# EAGLE board LnControlPanel (EAGLE 9.6.2)
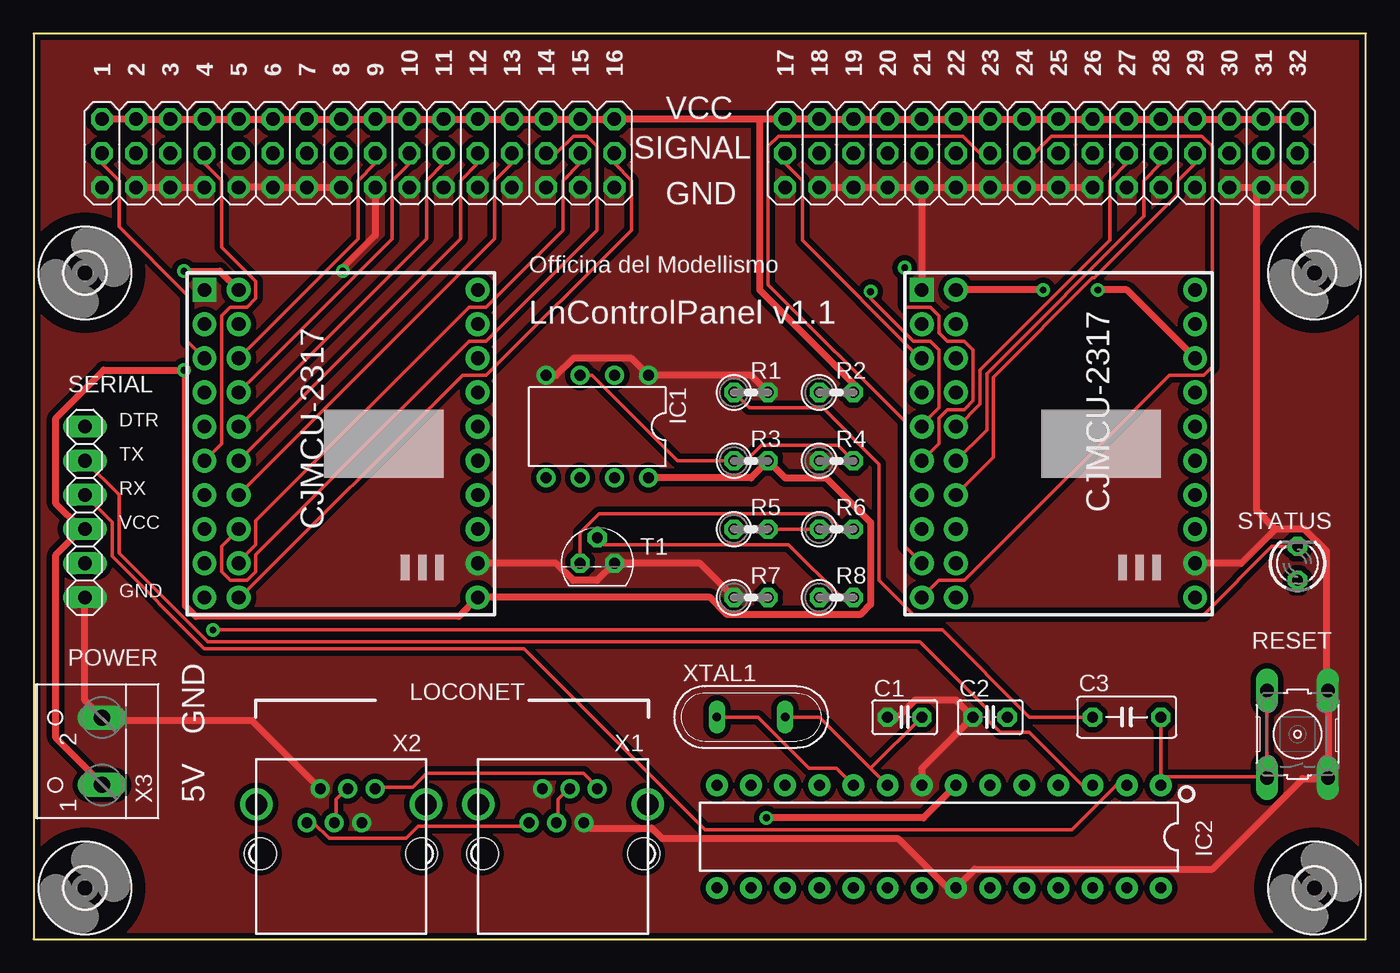
[diagram p0: board, top side]
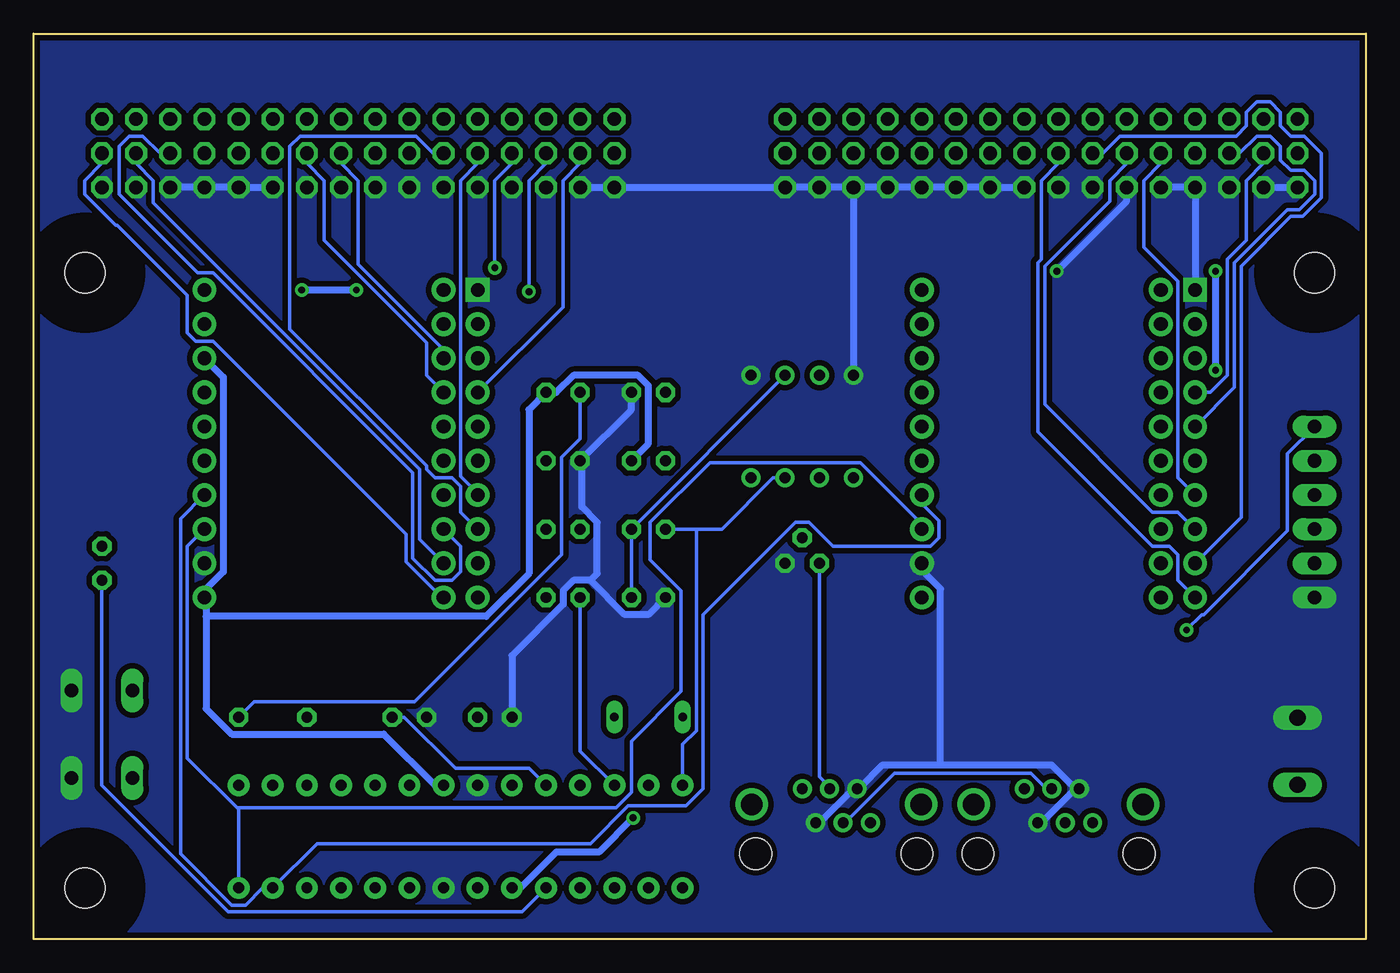
[diagram p1: board, bottom side, seen from below]

Size 99.06 x 67.31 mm. Coordinates in mm from the lower left corner, seen from the top.
Outline: 0,0 99.06,0 99.06,67.31 0,67.31 0,0
Copper layers (1*16): Top 0.035mm / dielectric 1.5mm / Bottom 0.035mm
Design rules "SparkFun": minimum track width 8mil, minimum drill 20mil, track to track 8mil, track to pad 8mil, pad to pad 8mil, via to via 8mil, smd to smd 8mil, copper to edge 10mil, drill to drill 8mil, minimum pad ring 12mil, minimum via ring 10mil, stop-mask expansion 4mil, vias tented up to drill 25mil, thermal gap 10mil
Net classes: 0 default: width 0.254 mm, clearance 0.254 mm; 1 power: width 0.508 mm, clearance 0.254 mm

## Footprints (pad centres in the part's own frame; a part is rotated, then mirrored left to right if it is on the bottom)
C025-025X050 = drill 0.813 octagon: 1 -1.27,0; 2 1.27,0
C050-030X075 = drill 0.813 octagon: 1 -2.54,0; 2 2.54,0
3,0 = hole 3: 0,0
DIL08 = drill 0.813 pad 1.27: 1 -3.81,-3.81; 2 -1.27,-3.81; 3 1.27,-3.81; 4 3.81,-3.81; 5 3.81,3.81; 6 1.27,3.81; 7 -1.27,3.81; 8 -3.81,3.81
3X16 = drill 1.016 octagon: 1 -19.05,-1.27; 2 -19.05,1.27; 3 -16.51,-1.27; 4 -16.51,1.27; 5 -13.97,-1.27; 6 -13.97,1.27; 7 -11.43,-1.27; 8 -11.43,1.27; 9 -8.89,-1.27; 10 -8.89,1.27; 11 -6.35,-1.27; 12 -6.35,1.27; 13 -3.81,-1.27; 14 -3.81,1.27; 15 -1.27,-1.27; 16 -1.27,1.27; 17 1.27,-1.27; 18 1.27,1.27; 19 3.81,-1.27; 20 3.81,1.27; 21 6.35,-1.27; 22 6.35,1.27; 23 8.89,-1.27; 24 8.89,1.27; 25 11.43,-1.27; 26 11.43,1.27; 27 13.97,-1.27; 28 13.97,1.27; 29 16.51,-1.27; 30 16.51,1.27; 31 19.05,-1.27; 32 19.05,1.27; 33 -19.05,-3.81; 34 -16.51,-3.81; 35 -13.97,-3.81; 36 -11.43,-3.81; 37 -8.89,-3.81; 38 -6.35,-3.81; 39 -3.81,-3.81; 40 -1.27,-3.81; 41 1.27,-3.81; 42 3.81,-3.81; 43 6.35,-3.81; 44 8.89,-3.81; 45 11.43,-3.81; 46 13.97,-3.81; 47 16.51,-3.81; 48 19.05,-3.81
LED3MM = drill 0.813 octagon: A -1.27,0; K 1.27,0
CJMCU-2317-PACKAGE2 = drill 1.016 pad 1.778: A0 7.62,5.08; A1 7.62,7.62; A2 7.62,10.16; CS 7.62,-2.54; GND 7.62,-10.16; ITA -12.7,7.62; ITB -10.16,7.62; PA0 -12.7,5.08; PA1 -12.7,2.54; PA2 -12.7,0; PA3 -12.7,-2.54; PA4 -12.7,-5.08; PA5 -12.7,-7.62; PA6 -12.7,-10.16; PA7 -12.7,-12.7; PB0 -10.16,5.08; PB1 -10.16,2.54; PB2 -10.16,0; PB3 -10.16,-2.54; PB4 -10.16,-5.08; PB5 -10.16,-7.62; PB6 -10.16,-10.16; PB7 -10.16,-12.7; RST 7.62,2.54; SCL 7.62,-7.62; SDA 7.62,-5.08; SO 7.62,0; VCC 7.62,-12.7; VCC_2 -10.16,10.16 | drill 1.016 pad 1.778 square: GND_2 -12.7,10.16
0207/2V = drill 0.813 octagon: 1 -1.27,0; 2 1.27,0
B3F-10XX = drill 1.016 long: 1 -3.251,2.261; 2 3.251,2.261; 3 -3.251,-2.261; 4 3.251,-2.261
1X06 = drill 1.016 long: 1 -6.35,0; 2 -3.81,0; 3 -1.27,0; 4 1.27,0; 5 3.81,0; 6 6.35,0
TO92 = drill 0.813 octagon: 1 1.27,0; 2 0,1.905; 3 -1.27,0
DIP28 = drill 0.813 pad 1.626: 1 -16.51,-3.81; 2 -13.97,-3.81; 3 -11.43,-3.81; 4 -8.89,-3.81; 5 -6.35,-3.81; 6 -3.81,-3.81; 7 -1.27,-3.81; 8 1.27,-3.81; 9 3.81,-3.81; 10 6.35,-3.81; 11 8.89,-3.81; 12 11.43,-3.81; 13 13.97,-3.81; 14 16.51,-3.81; 15 16.51,3.81; 16 13.97,3.81; 17 11.43,3.81; 18 8.89,3.81; 19 6.35,3.81; 20 3.81,3.81; 21 1.27,3.81; 22 -1.27,3.81; 23 -3.81,3.81; 24 -6.35,3.81; 25 -8.89,3.81; 26 -11.43,3.81; 27 -13.97,3.81; 28 -16.51,3.81
YH-55-10 = drill 0.8 pad 1.3: 1 -2.54,2.3; 2 -1.54,4.84; 3 -0.5,2.3; 4 0.5,4.84; 5 1.54,2.3; 6 2.54,4.84 | drill 1.6 pad 2.184: S1 -6.3,3.68; S2 6.3,3.68 | hole 2.36: -6,0; 6,0
W237-102 = drill 1.194 long: 1 -2.5,-1.27; 2 2.5,-1.27
QS = drill 0.61 long: 1 -2.54,0; 2 2.54,0

## Placement (x,y rotation side)
C1  22pF  [C025-025X050]  64.77,16.51 0 top
C2  22pF  [C025-025X050]  71.12,16.51 0 top
C3  100nF  [C050-030X075]  81.28,16.51 180 top
H1  MOUNT-HOLE3.0  [3,0]  3.81,49.53 0 top
H2  MOUNT-HOLE3.0  [3,0]  95.25,49.53 0 top
H3  MOUNT-HOLE3.0  [3,0]  3.81,3.81 0 top
H4  MOUNT-HOLE3.0  [3,0]  95.25,3.81 0 top
IC1  LM311N  [DIL08]  41.91,38.1 180 top
JP1  [3X16]  24.13,59.69 0 top
JP2  [3X16]  74.93,59.69 0 top
LED1  [LED3MM]  93.98,27.94 90 top
M1  CJMCU-2317LARGE  [CJMCU-2317-PACKAGE2]  25.4,38.1 0 top
M2  CJMCU-2317LARGE  [CJMCU-2317-PACKAGE2]  78.74,38.1 0 top
R1  1k  [0207/2V]  53.34,40.64 0 top
R2  10k  [0207/2V]  59.69,40.64 0 top
R3  10k  [0207/2V]  53.34,35.56 0 top
R4  22k  [0207/2V]  59.69,35.56 0 top
R5  220k  [0207/2V]  53.34,30.48 0 top
R6  47k  [0207/2V]  59.69,30.48 0 top
R7  150k  [0207/2V]  53.34,25.4 0 top
R8  4.7k  [0207/2V]  59.69,25.4 0 top
RESET_SW  [B3F-10XX]  93.98,15.24 90 top
SERIAL  [1X06]  3.81,31.75 90 top
T1  BC337  [TO92]  41.91,27.94 0 top
U1  328P  [DIP28]  67.31,7.62 180 top
X1  YH-55-10  [YH-55-10]  39.37,6.35 0 top
X2  YH-55-10  [YH-55-10]  22.86,6.35 0 top
X3  [W237-102]  3.81,13.97 90 top
XTAL1  16MHz  [QS]  53.34,16.51 0 top

## Library data of the parts
C1-C3 = rcl; SPICEPREFIX: C
H1-H4 = holes
IC1 = linear
JP1 JP2 M1 M2 = LucaDentella
LED1 = led
R1 R2 = rcl; SPICEPREFIX: R
R3-R8 = rcl
RESET_SW = switch-omron; MPN: B3F-1000; OC_FARNELL: 176432; OC_NEWARK: 36M3542
SERIAL = pinhead
T1 = transistor
U1 = SparkFun-IC-Microcontroller; PROD_ID: IC-09136
X1 X2 = con-wenzhou-yihua; OC_FARNELL: unknown; OC_NEWARK: unknown
X3 = con-wago-500; MPN: 237-102; OC_FARNELL: unknown; OC_NEWARK: 70K9898
XTAL1 = special

## Nets
+5V [power]: IC1.8 JP1.2 JP1.4 JP1.6 JP1.8 JP1.10 JP1.12 JP1.14 JP1.16 JP1.18 JP1.20 JP1.22 JP1.24 JP1.26 JP1.28 JP1.30 JP1.32 JP2.2 JP2.4 JP2.6 JP2.8 JP2.10 JP2.12 JP2.14 JP2.16 JP2.18 JP2.20 JP2.22 JP2.24 JP2.26 JP2.28 JP2.30 JP2.32 M1.VCC M1.VCC_2 M2.A0 M2.VCC M2.VCC_2 R2.2 R3.2 SERIAL.3 U1.7 U1.20 X3.1
GND [power]: C1.1 C2.1 IC1.1 IC1.4 JP1.33 JP1.34 JP1.35 JP1.36 JP1.37 JP1.38 JP1.39 JP1.40 JP1.41 JP1.42 JP1.43 JP1.44 JP1.45 JP1.46 JP1.47 JP1.48 JP2.33 JP2.34 JP2.35 JP2.36 JP2.37 JP2.38 JP2.39 JP2.40 JP2.41 JP2.42 JP2.43 JP2.44 JP2.45 JP2.46 JP2.47 JP2.48 M1.GND M1.GND_2 M2.GND M2.GND_2 R1.2 R4.1 R7.1 RESET_SW.3 RESET_SW.4 SERIAL.1 T1.1 U1.8 U1.22 X1.2 X1.5 X2.2 X2.5 X3.2
LNET: R6.2 T1.3 X1.3 X1.4 X2.3 X2.4
LNET_RX: IC1.7 R5.1 U1.14
LNET_TX: R8.1 U1.12
N$1: R8.2 T1.2
N$2: C2.2 U1.10 XTAL1.1
N$3: IC1.3 R3.1 R4.2
N$4: C1.2 U1.9 XTAL1.2
N$5: IC1.2 R5.2 R6.1 R7.2
N$6: JP1.1 M1.PA0
N$7: JP1.3 M1.PA1
N$8: JP1.5 M1.PA2
N$9: JP1.7 M1.PA3
N$10: JP1.9 M1.PA4
N$11: JP1.11 M1.PA5
N$12: JP1.13 M1.PA6
N$13: JP1.15 M1.PA7
N$14: JP1.17 M1.PB0
N$15: JP1.19 M1.PB1
N$16: JP1.21 M1.PB2
N$17: JP1.23 M1.PB3
N$18: JP1.25 M1.PB4
N$19: JP1.27 M1.PB5
N$20: JP1.29 M1.PB6
N$21: JP1.31 M1.PB7
N$22: JP2.1 M2.PA0
N$23: JP2.3 M2.PA1
N$24: JP2.5 M2.PA2
N$25: JP2.7 M2.PA3
N$26: JP2.9 M2.PA4
N$27: JP2.11 M2.PA5
N$28: JP2.13 M2.PA6
N$29: JP2.15 M2.PA7
N$30: JP2.17 M2.PB0
N$31: JP2.19 M2.PB1
N$32: JP2.21 M2.PB2
N$33: JP2.23 M2.PB3
N$34: JP2.25 M2.PB4
N$35: JP2.27 M2.PB5
N$36: JP2.29 M2.PB6
N$37: JP2.31 M2.PB7
N$38: C3.2 SERIAL.6
N$39: LED1.A U1.19
N$40: LED1.K R1.1
N$41: X1.1 X2.1
N$42: X1.6 X2.6
RESET: C3.1 R2.1 RESET_SW.1 RESET_SW.2 U1.1
RX: SERIAL.4 U1.2
SCL: M1.SCL M2.SCL U1.28
SDA: M1.SDA M2.SDA U1.27
TX: SERIAL.5 U1.3

## Tracks (layer width: path | path; a pad name or v marks a point on that pad's centre or on a via)
+5V  (via drill 0.51)
  Top 0.508: v54.48,9.02 66.17,9.02 U1.7 | v75.06,48.26 M2.VCC_2 | v79.12,48.26 81.28,48.26 M2.A0 | X3.1 5.08,11.56 1.65,14.99 1.65,28.58 3.56,30.48 SERIAL.3 3.43,30.61 1.65,32.39 1.65,38.73 5.21,42.29 v11.18,42.29 11.3,42.16 11.3,24.77 12.06,24 31.62,24 M1.VCC 50.29,25.4 51.56,24.13 61.47,24.13 62.23,24.89 62.23,30.99 58.93,34.29 55.88,34.29 R3.2 53.34,34.29 IC1.8 | M1.VCC_2 13.84,49.66 v11.18,49.66 | JP1.2 JP1.4 JP1.6 JP1.8 JP1.10 JP1.12 JP1.14 JP1.16 JP1.18 JP1.20 JP1.22 JP1.24 JP1.26 JP1.28 JP1.30 JP1.32 53.98,60.96 | JP2.32 JP2.30 JP2.28 JP2.26 JP2.24 JP2.22 JP2.20 JP2.18 JP2.16 JP2.14 JP2.12 JP2.10 JP2.8 JP2.6 JP2.4 JP2.2 53.98,60.96 | R2.2 60.96,41.28 53.98,48.26 53.98,60.96
  Bottom 0.508: U1.20 62.87,3.81 60.2,6.48 57.02,6.48 v54.48,9.02 | M2.A0 84.96,41.78 84.96,27.3 86.36,25.91 M2.VCC 86.23,25.27 86.23,24 | v79.12,48.26 v75.06,48.26 | U1.7 69.22,11.43 73.03,15.24 84.33,15.24 86.23,17.15 86.23,24 | v11.18,42.29 v11.18,49.66 | R3.2 53.34,36.83 53.34,41.15 54.1,41.91 58.93,41.91 60.2,40.64 R2.2 62.23,39.37 62.23,27.18 65.41,24 86.23,24
GND  (via drill 0.51)
  Top 0.508: IC1.4 38.86,41.91 40.13,43.18 44.45,43.18 IC1.1 53.34,41.91 R1.2 | C1.1 64.26,16.51 65.53,17.78 68.58,17.78 C2.1 66.04,12.7 U1.8 | R7.1 49.53,27.94 T1.1 41.91,26.67 40.13,26.67 38.86,27.94 M1.GND | JP1.37 JP1.38 JP1.39 JP1.40 | JP1.34 JP1.35 JP1.36 | JP2.34 JP2.35 JP2.36 JP2.37 | JP2.37 JP2.38 JP2.39 JP2.40 JP2.41 JP2.42 | JP2.37 M2.GND_2 | v22.99,49.66 22.99,49.91 25.4,52.32 JP1.41 | JP2.46 JP2.47 | JP2.47 JP2.48 | M2.GND 89.79,27.94 92.33,30.48 | 92.33,30.48 94.49,30.48 96.14,28.83 96.14,18.67 RESET_SW.4 96.27,18.41 96.27,12.06 RESET_SW.3 96.01,11.94 94.36,11.94 87.63,5.21 69.98,5.21 U1.22 67.94,3.81 64.26,7.49 46.74,7.49 45.97,8.26 41.4,8.26 41.02,8.64 X1.5 | 92.33,30.48 90.93,31.88 90.93,55.75 JP2.47 | SERIAL.1 3.81,17.78 5.08,16.51 X3.2 5.21,16.26 16.26,16.26 21.21,11.3 X2.2
  Bottom 0.508: R1.2 54.61,39.37 R4.1 58.29,35.43 58.29,32.13 57.15,30.99 57.15,27.18 57.66,26.67 | C1.1 63.5,21.08 59.69,24.89 59.69,25.91 58.93,26.67 57.66,26.67 | 57.66,26.67 55.12,24.13 53.34,24.13 R7.1 | JP1.34 JP1.33 | M1.GND_2 JP1.36 JP1.37 | JP1.41 JP1.42 JP1.43 JP1.44 JP1.45 JP1.46 | JP1.46 JP1.47 JP1.48 JP2.33 JP2.34 | JP1.38 17.78,54.86 v22.99,49.66 | JP1.46 IC1.4 | JP2.43 JP2.44 JP2.45 JP2.46 | X2.5 24.38,8.76 24,8.76 21.59,11.18 21.34,11.18 X2.2 21.72,11.3 23.37,12.95 31.62,12.95 | X1.5 40.89,8.76 40.51,8.76 38.1,11.18 37.85,11.18 X1.2 37.59,11.3 35.94,12.95 31.62,12.95 | M1.GND 33.02,27.43 31.62,26.03 31.62,12.95
  pour Top (isolate 0.406, no thermals): 0,67.31 99.06,67.31 99.06,0 0,0
  pour Bottom (isolate 0.406, no thermals): 0,67.31 99.06,67.31 99.06,1.27 99.06,0 0,0
LNET
  Top 0.254: X2.3 22.48,8.76 22.48,10.41 23.24,11.18 X2.4 | X1.3 38.99,8.76 38.99,10.41 39.75,11.18 X1.4 | R6.2 60.07,30.48 58.93,31.62 42.04,31.62 40.64,30.23 T1.3
  Bottom 0.254: T1.3 40.64,12.06 39.88,11.3 X1.4 | X2.4 23.37,11.3 23.88,11.3 24.89,12.32 35.05,12.32 38.61,8.76 38.86,8.76 X1.3
LNET_RX
  Bottom 0.254: IC1.7 44.07,34.29 47.88,30.48 49.78,30.48 | R5.1 49.78,30.48 | U1.14 50.8,14.48 49.78,15.49 49.78,30.48
LNET_TX
  Bottom 0.254: R8.1 58.42,13.97 U1.12
N$1
  Top 0.254: R8.2 60.07,25.4 56.13,29.34 42.42,29.34 T1.2
N$2
  Top 0.254: XTAL1.1 53.85,16.51 57.66,12.7 59.69,12.7 U1.10
  Bottom 0.254: C2.2 71.5,16.51 67.69,12.7 62.23,12.7 U1.10
N$3
  Top 0.254: R4.2 59.82,36.7 54.1,36.7 52.96,35.56 R3.1 47.88,35.56 41.53,41.91 IC1.3
N$4
  Top 0.254: XTAL1.2 58.42,16.51 62.23,12.7 | U1.9 62.23,12.7 | 62.23,12.7 C1.2
N$5
  Top 0.254: R5.2 R6.1
  Bottom 0.254: R7.2 R5.2 IC1.2
N$6
  Top 0.254: JP1.1 5.08,57.66 6.35,56.39 6.35,52.96 11.43,47.88 11.43,44.45 M1.PA0
N$7
  Bottom 0.254: JP1.3 7.62,57.66 8.89,56.39 8.89,51.94 10.29,50.55 10.29,41.91 11.56,40.64 M1.PA1
N$8
  Bottom 0.254: JP1.5 9.4,58.42 8.13,59.69 7.11,59.69 6.35,58.93 6.35,57.91 5.59,57.15 4.57,57.15 3.81,56.39 3.81,55.37 4.95,54.23 5.84,54.23 9.78,50.29 9.78,41.02 M1.PA2
N$9
  Top 0.254: JP1.7 12.7,57.66 13.97,56.39 13.97,51.44 16.51,48.89 16.51,47.62 15.88,46.99 14.61,46.99 13.97,46.36 13.97,36.83 M1.PA3
N$10
  Bottom 0.254: JP1.9 15.24,57.66 16.51,56.39 16.51,51.44 13.97,48.89 13.97,34.29 M1.PA4
N$11
  Bottom 0.254: JP1.11 17.78,57.66 19.05,56.39 19.05,54.86 23.88,50.04 23.88,39.75 15.88,31.75 13.97,31.75 M1.PA5
N$12
  Bottom 0.254: JP1.13 19.56,58.42 18.29,59.69 9.65,59.69 8.89,60.45 8.89,61.47 8.13,62.23 7.11,62.23 6.35,61.47 6.35,60.45 5.59,59.69 4.57,59.69 3.3,58.42 3.3,55.12 4.7,53.72 5.59,53.72 9.27,50.04 9.27,31.37 M1.PA6
N$13
  Bottom 0.254: JP1.15 22.86,57.66 24.13,56.39 24.13,50.55 24.38,50.29 24.38,37.72 15.88,29.21 14.61,29.21 13.97,28.58 13.97,26.67 M1.PA7
N$14
  Top 0.254: JP1.17 25.4,57.66 24.13,56.39 24.13,52.07 M1.PB0
N$15
  Top 0.254: JP1.19 27.94,57.66 26.67,56.39 26.67,52.07 M1.PB1
N$16
  Top 0.254: JP1.21 30.48,57.66 29.21,56.39 29.21,52.07 M1.PB2
N$17
  Top 0.254: JP1.23 33.02,57.66 31.75,56.39 31.75,52.07 M1.PB3
N$18
  Top 0.254: JP1.25 35.56,57.66 34.29,56.39 34.29,52.07 M1.PB4
N$19
  Top 0.254: JP1.27 38.86,58.42 40.13,59.69 41.15,59.69 41.91,58.93 41.91,52.7 33.66,44.45 32.38,44.45 16.51,28.58 16.51,27.3 15.88,26.67 14.61,26.67 13.97,27.3 13.97,29.21 M1.PB5
N$20
  Top 0.254: JP1.29 40.64,57.66 39.37,56.39 39.37,52.7 33.66,46.99 32.38,46.99 16.51,31.12 16.51,29.34 15.24,28.07 M1.PB6
N$21
  Top 0.254: JP1.31 43.18,57.66 44.45,56.39 44.45,52.7 33.66,41.91 31.88,41.91 15.37,25.4 M1.PB7
N$22
  Top 0.254: JP2.1 55.88,57.66 57.15,56.39 57.15,51.94 65.91,43.18 M2.PA0
N$23
  Bottom 0.254: JP2.3 58.42,57.66 59.69,56.39 59.69,46.99 M2.PA1
N$24  (via drill 0.51)
  Top 0.254: v62.23,48.13 62.23,47.62 65.41,44.45 66.67,44.45 67.31,43.81 67.31,39.5 66.04,38.23 M2.PA2
  Bottom 0.254: JP2.5 60.96,57.66 62.23,56.39 v62.23,48.13
N$25  (via drill 0.51)
  Top 0.254: v64.77,49.91 64.77,47.12 64.9,46.99 66.67,46.99 67.31,46.36 67.31,45.08 67.94,44.45 69.22,44.45 69.85,43.81 69.85,40 69.22,39.37 67.94,39.37 67.31,38.73 67.31,36.83 M2.PA3
  Bottom 0.254: JP2.7 63.5,57.66 64.77,56.39 v64.77,49.91
N$26
  Bottom 0.254: JP2.9 66.04,57.66 67.31,56.39 67.31,34.42 66.04,33.15 M2.PA4
N$27
  Bottom 0.254: JP2.11 69.34,58.42 70.61,59.69 79.25,59.69 80.01,58.93 80.01,45.34 69.85,35.18 69.85,34.92 69.22,34.29 67.94,34.29 67.31,33.66 67.31,31.75 M2.PA5
N$28
  Top 0.254: JP2.13 70.36,58.42 69.09,59.69 55.37,59.69 54.61,58.93 54.61,48.64 64.77,38.48 64.77,29.21 M2.PA6
N$29
  Top 0.254: JP2.15 74.42,58.42 75.69,59.69 86.87,59.69 87.63,58.93 87.63,42.55 87,41.91 84.45,41.91 69.22,26.67 67.31,26.67 M2.PA7
N$30
  Bottom 0.254: JP2.17 76.2,57.66 74.93,56.39 74.93,50.17 68.58,43.81 M2.PB0
N$31
  Bottom 0.254: JP2.19 78.74,57.66 77.47,56.39 77.47,51.94 69.85,44.32 69.85,41.91 M2.PB1
N$32
  Top 0.254: JP2.21 81.28,57.66 80.01,56.39 80.01,51.94 70.36,42.29 70.36,39.75 68.71,38.1 M2.PB2
N$33
  Top 0.254: JP2.23 83.82,57.66 82.55,56.39 82.55,53.72 70.87,42.04 70.87,37.85 M2.PB3
N$34
  Top 0.254: JP2.25 86.36,57.66 85.09,56.39 85.09,55.37 78.87,49.15 78.74,49.15 71.37,41.78 71.37,35.81 M2.PB4
N$35
  Bottom 0.254: JP2.27 89.66,58.42 90.93,59.69 91.95,59.69 92.71,58.93 92.71,55.37 86.87,49.53 85.72,49.53 70.87,34.67 70.87,28.32 69.22,26.67 67.94,26.67 67.31,27.3 67.31,29.21 M2.PB5
N$36
  Bottom 0.254: JP2.29 91.44,57.66 90.17,56.39 90.17,54.74 70.36,34.92 70.36,29.72 M2.PB6
N$37
  Bottom 0.254: JP2.31 93.98,57.66 95.25,56.39 95.25,55.37 92.96,53.09 92.84,53.09 87.63,47.88 87.63,45.08 87,44.45 85.72,44.45 71.37,30.1 71.37,28.07 68.71,25.4 M2.PB7
N$38  (via drill 0.51)
  Top 0.254: C3.2 74.04,16.51 67.56,22.99 v13.34,22.99
  Bottom 0.254: v13.34,22.99 12.19,24.13 12.06,24.13 5.84,30.35 5.84,36.07 SERIAL.6
N$39
  Bottom 0.254: LED1.A 93.98,11.43 84.58,2.03 62.74,2.03 U1.19
N$40
  Top 0.254: LED1.K 92.08,29.21 87,24.13 65.41,24.13 62.87,26.67 62.87,35.31 58.67,39.5 53.21,39.5 R1.1
N$41
  Top 0.254: X2.1 20.32,8.64 20.83,8.64 21.97,7.49 27.69,7.49 28.57,8.38 36.58,8.38 36.83,8.64 X1.1
N$42
  Top 0.254: X2.6 25.4,11.3 28.19,11.3 29.21,12.32 40.89,12.32 41.91,11.3 X1.6
RESET
  Top 0.254: RESET_SW.2 91.69,18.41 91.69,12.06 RESET_SW.1 91.57,12.06 83.82,12.06 | C3.1 83.82,12.06 | 83.82,12.06 U1.1
  Bottom 0.254: R2.1 58.42,37.21 59.82,35.81 59.82,28.58 70.74,17.65 82.68,17.65 C3.1
RX
  Top 0.254: U1.2 80.52,11.43 77.22,8.13 49.91,8.13 36.45,21.59 12.7,21.59 5.84,28.45 5.84,30.99 SERIAL.4
SCL
  Bottom 0.254: U1.28 83.82,9.65 83.88,9.72 | 83.88,9.72 87.63,13.46 87.63,29.21 M2.SCL | M1.SCL 33.02,30.86 37.59,35.43 48.77,35.43 53.21,30.99 53.21,28.19 50.93,25.91 50.93,18.41 54.61,14.73 54.61,10.92 55.75,9.78 83.82,9.78 83.88,9.72
SDA
  Bottom 0.254: M2.SDA 88.14,31.24 88.14,6.35 84.33,2.54 83.31,2.54 82.04,3.81 U1.27 77.98,7.11 57.66,7.11 54.86,9.91 50.55,9.91 49.28,11.18 49.28,24.13 42.42,30.99 41.4,30.99 39.62,29.21 32.38,29.21 31.75,29.84 31.75,31.12 33.02,32.39 M1.SDA
TX
  Top 0.254: U1.3 77.98,11.43 74.04,15.37 71.88,15.37 70.99,16.26 70.99,17.02 65.91,22.1 12.95,22.1 6.35,28.7 6.35,33.02 SERIAL.5

## Text on the board
tPlace: 1 | 2 | 3 | 4 | 5 | 6 | 7 | 8 | 9 | 10 | 11 | 12 | 13 | 14 | 15 | 16 | 17 | 18 | 19 | 20 | 21 | 22 | 23 | 24 | 25 | 26 | 27 | 28 | 29 | 30 | 31 | 32 | VCC | SIGNAL | GND | Officina del Modellismo | LnControlPanel v1.1 | SERIAL | DTR | TX | RX | CJMCU-2317 | STATUS | VCC | CJMCU-2317 | GND | RESET | POWER | LOCONET | GND | 5V | IC2